# Altium PCB max.PcbDoc
Units mm, origin at the board's own origin, x right, y up, seen from the top; angles counter-clockwise.
Board outline 61 x 42 mm, 2 copper layers (Top Layer, Bottom Layer); 14 components, 20 nets, 110 pads, 35 vias.
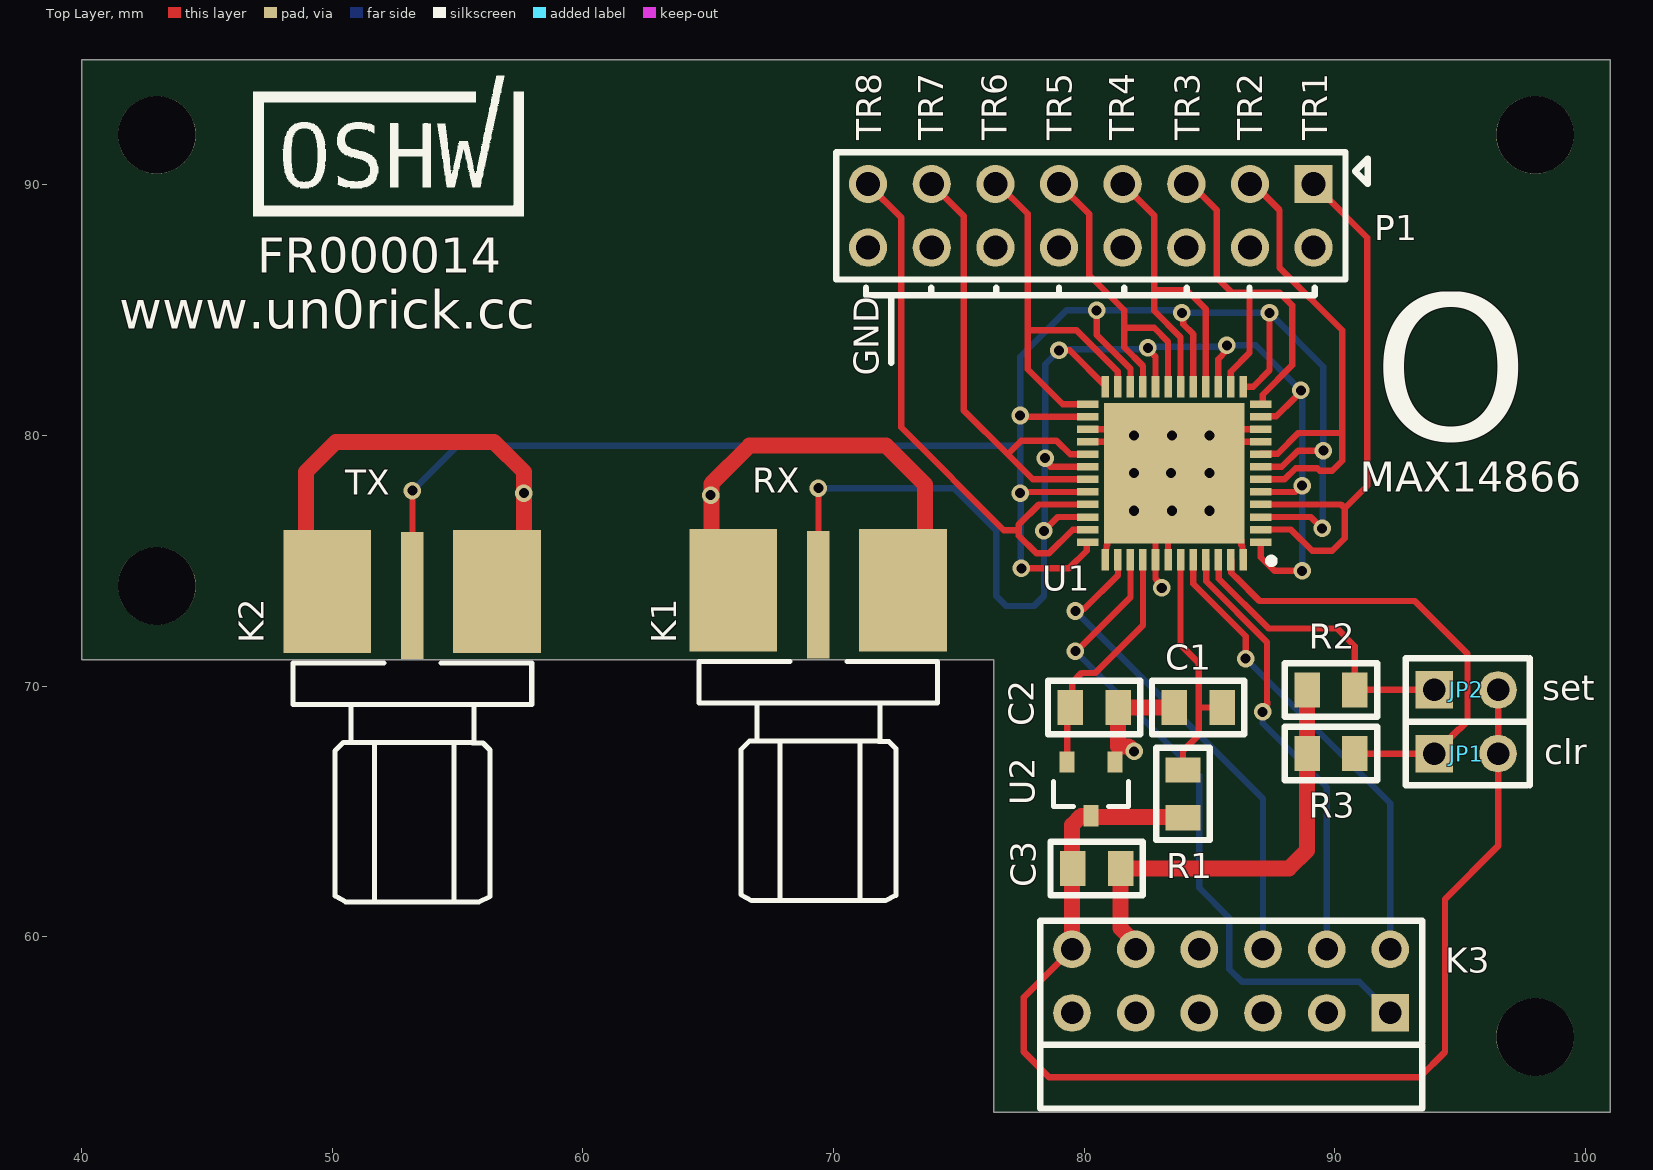
[diagram p0: Top Layer view]
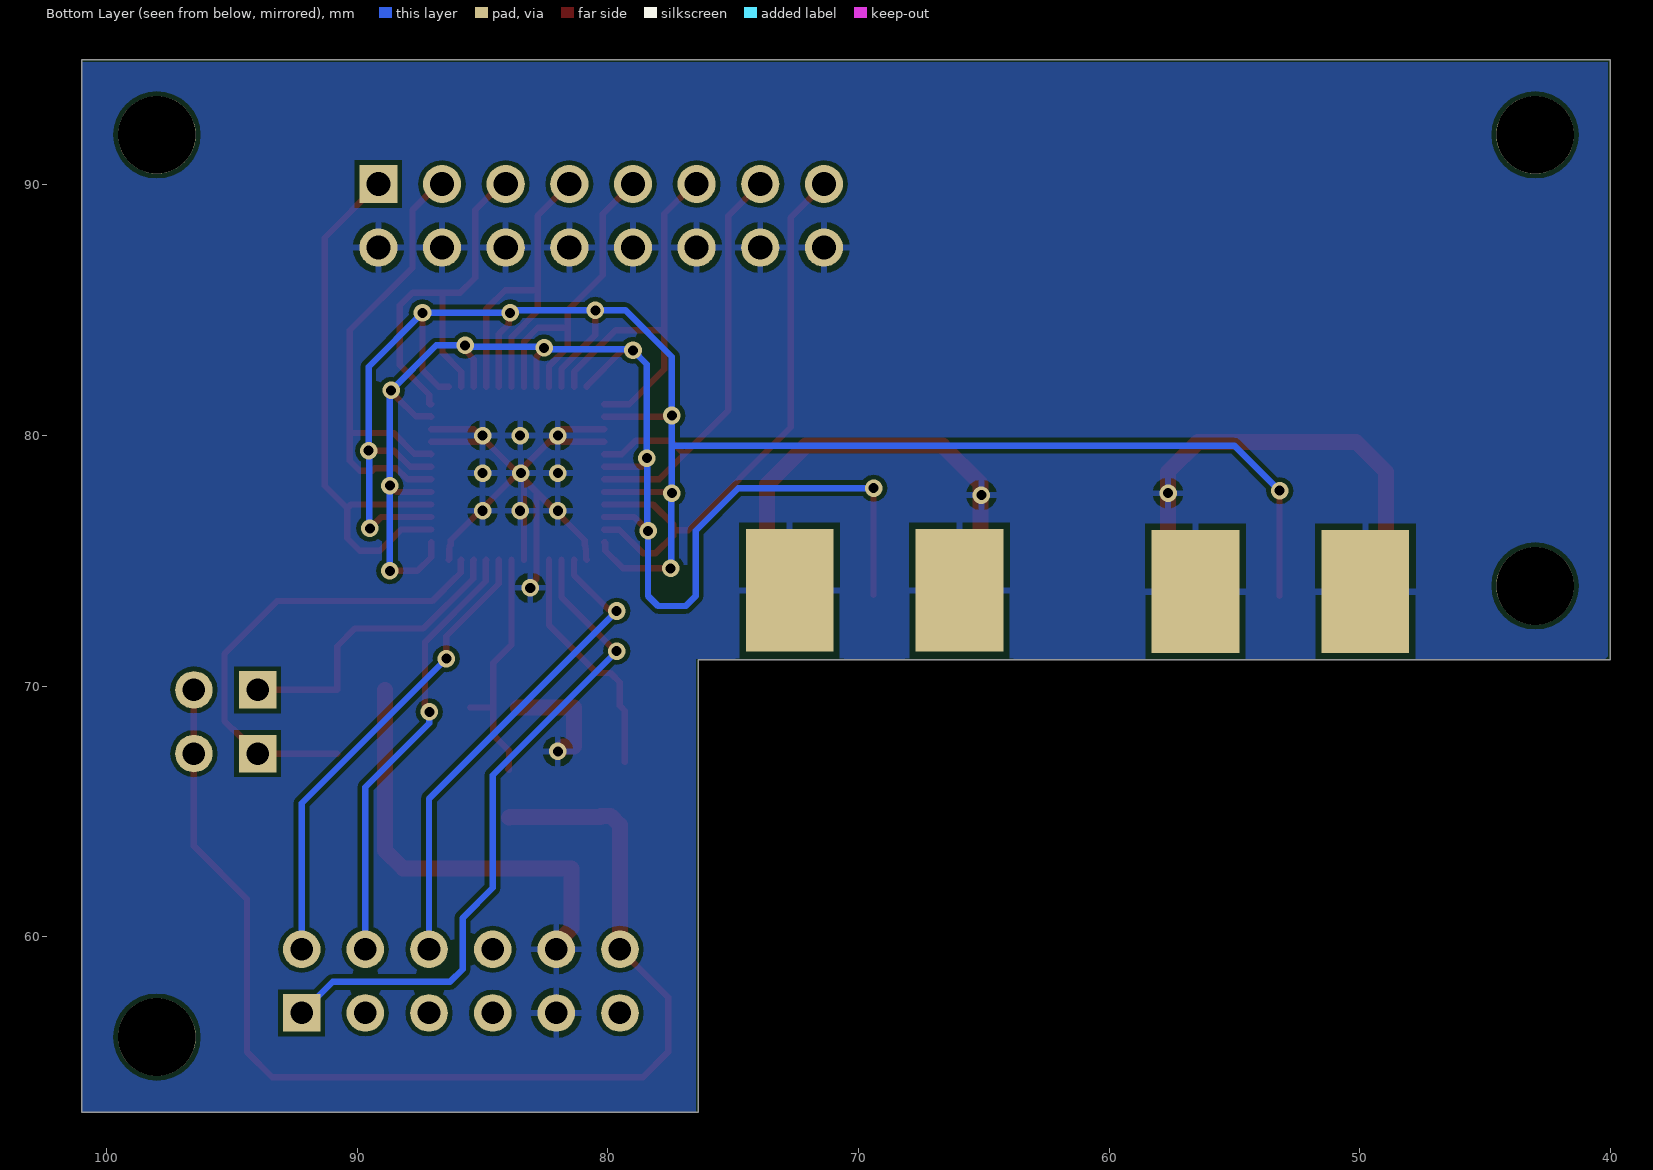
[diagram p1: Bottom Layer view, seen from below]

## Layer stack, top to bottom
Top Solder: solder mask 0.0102, Solder Resist, Dk 3.5
Top Layer: signal copper 0.0356
Dielectric 1: dielectric 0.32, FR-4, Dk 4.8
Bottom Layer: signal copper 0.0356
Bottom Solder: solder mask 0.0102, Solder Resist, Dk 3.5

## Board outline
76.404,71.054 76.404,53 101,53 101,95 40,95 40,71.054

## Design rules (kind name [scope] priority, off if disabled: settings)
Clearance [All] p1: gap=0.178 ignorepadtopadclearanceinfootprint=TRUE
ComponentClearance [All] p1: gap=0 collisioncheckmode=3 verticalgap=0 showdistances=FALSE
HoleSize [All] p1: absolutevalues=TRUE maxlimit=3.81 minlimit=0.025 maxpercent=80.000 minpercent=20.000
MinimumSolderMaskSliver [All] p1: minsoldermaskwidth=0
PolygonConnect [All] p1: connectstyle=Relief reliefconductorwidth=0.254 reliefentries=4 polygonreliefangle="90 Angle" airgapwidth=0.254
RoutingVias [All] p1: holewidth=0.3 width=0.7 viastyle="Through Hole" minholewidth=0.3 minwidth=0.7 maxholewidth=0.3 maxwidth=0.7
SilkToSilkClearance [All] p1: silktosilkclearance=0.152
SilkToSolderMaskClearance [IsPad] p1: minsilkscreentomaskgap=0.102 clearancetoexposedcopper=TRUE
SolderMaskExpansion [All] p1: expansion=0.102 istentingtop=FALSE
Width [All] p1: maxlimit=2.54 minlimit=0.254 preferedwidth=0.254
25 further rules are at their usual default settings.

## Components (designator, comment, footprint, x,y, rotation, side; value= is the part's Value field where it differs from the comment)
C1 "cap0805" SM0805 85.505,69.15 r180 top value=0.1
C2 "cap0805" SM0805 79.45,69.15 r0 top value=1u
C3 "cap0805" SM0805 81.455,62.725 r180 top value=1u
JP1 "JUMPER2" JUMPER2 93.98,67.31 r90 top
JP2 "JUMPER2" JUMPER2 93.98,69.85 r90 top
K1 "SMA_MALE_FEMALE" "AMPHENOL_MALE _FEMALE" 69.4,72.25 r90 top
K2 "SMA_MALE_FEMALE" "AMPHENOL_MALE _FEMALE" 53.2,72.2 r90 top
K3 "PMOD_6x2_ra_male_mirrored" PMOD_6x2_RA_MALE_MIRRORED 79.52,59.5 r0 top
P1 "2x8, 2.54mm vertical" "2x8 pin 2.54mm" 89.16,90.04 r270 top
R1 "res0805_EU" SM0805 83.95,66.655 r270 top value=10
R2 "res0805_EU" SM0805 90.805,69.85 r180 top value=10k
R3 "res0805_EU" SM0805 90.805,67.31 r180 top value=10k
U1 "MAX14866UTM+" QFN50P700X700X80-49N 83.6,78.5 r180 top
U2 "XC6206" SOT-23 80.275,65.9 r270 top

## Footprints (in the part's own frame and the unit in brackets; to place one, negate y for a bottom-side part, rotate by r counter-clockwise, add the part's x,y. Pads: shape width x height; smd on the part's side, far side on the other; paste and mask are expansions set on the pad)
"2x8 pin 2.54mm" [mil] "2x8 pin 2.54mm"
  rect 60x60 hole 38: 1(0,0)
  round 60 hole 38: 2(100,0) 3(0,-100) 4(100,-100) 5(0,-200) 6(100,-200) 7(0,-300) 8(100,-300) 9(0,-400) 10(100,-400) 11(0,-500) 12(100,-500) 13(0,-600) 14(100,-600) 15(0,-700) 16(100,-700)
  silkscreen extent -50,-750 150,85
"AMPHENOL_MALE _FEMALE" [mm]
  rect 5.1x0.9 smd: 1(1.397,0)
  rect 4.9x3.5 smd: 2(1.575,3.4) 2(1.575,-3.375)
  rect 4.9x3.5 smd far side: 2(1.575,3.425) 2(1.575,-3.35)
  silkscreen extent -10.81,-4.76 -1.28,4.76, body extent -10.8,-4.76 3.48,4.76, height 4.08
JUMPER2 [mm]
  rect 1.5x1.5 hole 0.9: 1(0,0)
  round 1.5 hole 0.9: 2(0,-2.54)
  silkscreen extent -1.27,-3.81 1.27,1.14
PMOD_6x2_RA_MALE_MIRRORED [mm] "2.54 mm right angle 6x2 pins"
  rect 1.5x1.5 hole 0.9: 1(12.7,-2.54)
  round 1.5 hole 0.9: 2(10.16,-2.54) 3(7.62,-2.54) 4(5.08,-2.54) 5(2.54,-2.54) 6(0,-2.54) 7(12.7,0) 8(10.16,0) 9(7.62,0) 10(5.08,0) 11(2.54,0) 12(0,0)
  silkscreen extent -1.27,-6.35 13.97,1.14
QFN50P700X700X80-49N [mm]
  rect 0.85x0.3 smd: 1(-3.45,2.75) 2(-3.45,2.25) 3(-3.45,1.75) 4(-3.45,1.25) 5(-3.45,0.75) 6(-3.45,0.25) 7(-3.45,-0.25) 8(-3.45,-0.75) 9(-3.45,-1.25) 10(-3.45,-1.75) 11(-3.45,-2.25) 12(-3.45,-2.75) 25(3.45,-2.75) 26(3.45,-2.25) 27(3.45,-1.75) 28(3.45,-1.25) 29(3.45,-0.75) 30(3.45,-0.25) 31(3.45,0.25) 32(3.45,0.75) 33(3.45,1.25) 34(3.45,1.75) 35(3.45,2.25) 36(3.45,2.75)
  rect 0.3x0.85 smd: 13(-2.75,-3.45) 14(-2.25,-3.45) 15(-1.75,-3.45) 16(-1.25,-3.45) 17(-0.75,-3.45) 18(-0.25,-3.45) 19(0.25,-3.45) 20(0.75,-3.45) 21(1.25,-3.45) 22(1.75,-3.45) 23(2.25,-3.45) 24(2.75,-3.45) 37(2.75,3.45) 38(2.25,3.45) 39(1.75,3.45) 40(1.25,3.45) 41(0.75,3.45) 42(0.25,3.45) 43(-0.25,3.45) 44(-0.75,3.45) 45(-1.25,3.45) 46(-1.75,3.45) 47(-2.25,3.45) 48(-2.75,3.45)
  rect 5.6x5.6 smd: 49(0,0)
  silkscreen extent -4,3.38 -3.75,3.62, body extent -3.55,-3.55 3.55,3.55, height 0.8
SM0805 [mil]
  rect 40x55 smd: 1(0,0) 2(75,0)
  silkscreen extent -35,-42 110,42
SOT-23 [mm] "SOT23_L from misc devices"
  rect 0.85x0.6 smd: 1(-1.075,0.95) 2(-1.075,-0.95) 3(1.075,0)
  silkscreen extent -0.3,-1.5 0.7,1.5, body extent -0.7,-1.5 0.7,1.5, height 1.1

## Part data
C1 C2 C3: "Capacitor", LatestRevisionDate=17-Jul-2002, LatestRevisionNote="Re-released for DXP Platform.", PackageDescription="Radial Cap, Thru-Hole; 2 Leads; 0.3 in Pin Spacing", PackageReference=RAD-0.3, Published=8-Jun-2000, Publisher="Altium Limited"
K3: "PMOD_6x2_right_angle"
P1: library part "2x8, 2.54mm, vertical", "Header, 16-Pin", LatestRevisionDate=17-Jul-2002, LatestRevisionNote="Re-released for DXP Platform.", Publisher="Altium Limited"
R1 R2 R3: "Resistor", LatestRevisionDate=29-May-2009, LatestRevisionNote="IPC-7351 Footprint Added.", PackageDescription="Chip Resistor", PackageReference=J1-0603, Published=8-Jun-2000, Publisher="Altium Limited"
U1: "Integrated Circuit", Manufacturer_Name="Maxim Integrated", Mouser Part Number=700-MAX14866UTM+, Datasheet Link=https://www.mouser.com/datasheet/2/256/MAX14866-1154497.pdf, Height=0.8mm, Manufacturer_Part_Number=MAX14866UTM+, Mouser Price/Stock=https://www.mouser.co.uk/ProductDetail/Maxim-Integrated/MAX14866UTM%2b?qs=1mbolxNpo8f6nC88ZZmOdg%3D%3D
U2: "SOT-23-3 ldo"

## Free pads (board coordinates)
  round 3.1 hole 3.1 unplated: 0(43,74) 0(43,92) 0(98,56) 0(98,92)

## Via types
v1: diameter 0.7, hole 0.4, Top Layer to Bottom Layer, 35 vias

## Nets (pads, with @x,y where several pads share a name; then routed paths per layer and width w, separated by ;. In a path a pad name is that pad's centre, name@x,y a point inside that pad or via, vN(x,y) a via of type N, cw(c..) or ccw(c..) an arc to the next point about the centre after c; other vN are vias at no path point)
+5V: C3.2 JP1.2 JP2.2 K3.12 R1.2 U2.3 | length 47.4
  Top Layer w0.254: K3.12 77.6,57.58 77.6,55.4 78.6,54.4 93.4,54.4 94.4,55.4 94.4,61.5 96.52,63.62 JP1.2 JP2.2
  Top Layer w0.635: K3.12 79.52,64.453 79.892,64.825 U2.3 80.275,64.805 80.293,64.788 83.912,64.788 R1.2
clk: K3.8 U1.45 | length 17.7
  Top Layer w0.254: U1.45 84.873,75.027 84.873,74.18 87.3,71.753 87.3,69.375 87.307,69.368 87.307,69.278 87.125,69.096 v1(87.125,68.975)
  Bottom Layer w0.254: v1(87.125,68.975) 87.125,68.525 89.68,65.97 K3.8
clr: JP1.1 R3.1 U1.47 | length 19
  Top Layer w0.254: U1.47 85.873,75.027 85.873,74.521 86.074,74.32 86.08,74.32 87,73.4 93.2,73.4 95.3,71.3 95.3,68.6 94.992,68.292 94.962,68.292 JP1.1 90.905,67.31 R3.1
din: K3.7 U1.44 | length 18.7
  Top Layer w0.254: U1.44 84.35,74.093 86.45,71.993 86.45,71.306 86.444,71.3 v1@86.4,71.3
  Bottom Layer w0.254: v1(86.45,71.1) 92.22,65.33 K3.7
dout: K3.1 U1.39 | length 26.9
  Top Layer w0.254: v1@79.7,71.4 80.4,72.1 81.85,73.55 U1.39
  Bottom Layer w0.254: v1(79.65,71.4) 84.6,66.45 84.6,61.95 85.8,60.75 85.8,58.7 86.3,58.2 90.98,58.2 K3.1
GND: C1.2 C2.2 C3.1 K1.2 K2.2 K3.5 K3.11 P1.2 P1.4 P1.6 P1.8 P1.10 P1.12 P1.14 P1.16 R2.2 R3.2 U1.9 U1.10 U1.27 U1.28 U1.37 U1.41 U1.42 U1.48 U1.49 U2.1 | length 89.1
  Top Layer w0.254: U1.28 U1.49@82.35,79.75 ; U1.27 81.85,80.25 U1.49@82.35,79.75 ; U1.37 80.873,75.073 80.873,75.467 80.895,75.489 80.895,75.601 80.927,75.633 80.927,75.827 U1.49@82.85,77.75 ; C2.2@81.16,68.959 C2.2@81.16,69.15 ; v1(83.1,73.925) 83.1,74.03 82.85,74.28 U1.41 U1.49@82.85,77.75 ; U1.42 U1.49@83.35,78.25 ; U1.48 86.327,75.073 86.327,75.467 86.32,75.474 86.32,75.586 86.273,75.633 86.273,75.827 U1.49 ; U1.9 U1.49@84.85,79.75 ; U1.10 85.35,80.25 U1.49@84.85,79.75 ; U1.49@82.35,79.75 83.475,78.625 v1(83.475,78.5) ; U1.49@82.85,77.75 U1.49@83.35,78.25 ; U1.49@83.35,78.25 83.475,78.375 v1(83.475,78.5) ; v1(83.475,78.5) U1.49 ; v1(83.475,78.5) U1.49 ; U1.49 U1.49@84.85,79.75
  Top Layer w0.635: K2.2@48.95,73.775 48.95,78.55 50.15,79.75 56.45,79.75 57.65,78.55 57.65,73.975 K2.2@57.45,73.775 ; K1.2@65.15,73.825 65.125,73.85 65.125,78.075 66.65,79.6 72.1,79.6 73.65,78.05 K1.2@73.65,73.825 ; v1@81.95,67.425 81.775,67.6 81.355,67.6 C2.2 C1.2 ; K3.11 82.06,59.734 81.455,60.339 C3.1 88.175,62.725 88.9,63.45 R3.2 R2.2
  other v1: 82,67.4 82,77 83.5,77 85,77 65.1,77.625 57.65,77.7 82,78.5 85,78.5 82,80 83.5,80 85,80
le: K3.9 U1.38 | length 19.5
  Top Layer w0.254: v1(79.65,73) 79.735,73.085 80.01,73.085 81.352,74.427 81.352,75.048 U1.38
  Bottom Layer w0.254: v1(79.65,73) 87.14,65.51 K3.9
NetC1_1: C1.1 R1.1 U1.43 | length 9.9
  Top Layer w0.254: U1.43 83.85,71.65 84.575,70.925 84.575,69.125 ; R1.1@83.975,66.68 R1.1 83.95,67.425 84.575,68.05 84.575,69.125 ; C1.1 84.6,69.15 84.575,69.125
NetC2_1: C2.1 U1.40 U2.2 | length 9.7
  Top Layer w0.254: U2.2 79.325,69.025 C2.1 79.525,69.225 79.525,70.15 79.9,70.525 80.45,70.525 82.35,72.425 U1.40
NetK1_1: K1.1 U1.1 U1.5 U1.11 U1.15 U1.20 U1.24 U1.30 U1.34 | length 60.2
  Top Layer w0.254: K1.1 v1(69.4,77.9) ; v1(78.4,76.2) 78.95,76.75 U1.34 ; v1@78.4,79 78.65,78.75 U1.30 ; v1(79,83.4) 79.427,83.4 80.85,81.977 U1.24 ; v1@82.6,83.4 82.85,83.15 U1.20 ; U1.15 85.35,83.05 85.7,83.4 v1(85.7,83.6) ; U1.1 87.05,75.15 87.6,74.6 v1(88.7,74.6) ; U1.5 88.429,77.75 88.679,78 v1(88.7,78) ; U1.11 87.073,80.773 87.673,80.773 88.4,81.5
  Bottom Layer w0.254: v1(69.4,77.9) 74.8,77.9 76.5,76.2 76.5,73.6 76.9,73.2 78,73.2 78.4,73.6 v1(78.4,76.2) 78.425,76.225 78.425,79.075 v1(78.45,79.1) 78.45,82.85 v1(79,83.4) 79.05,83.45 82.5,83.45 v1(82.55,83.5) 82.6,83.55 85.65,83.55 v1(85.7,83.6) 86.85,83.6 v1(88.65,81.8) 88.7,81.75 v1(88.7,78) 88.7,75.735 v1(88.7,74.6)
NetK2_1: K2.1 U1.3 U1.7 U1.13 U1.17 U1.22 U1.26 U1.32 U1.36 | length 82.4
  Top Layer w0.254: K2.1 v1(53.2,77.8) ; v1@77.4,77.7 77.45,77.75 U1.32 ; v1(77.5,74.7) 79.4,74.7 80.1,75.4 80.1,75.727 80.123,75.75 U1.36 ; v1@77.5,80.8 77.55,80.75 U1.26 ; v1(80.5,85) 80.5,84.013 81.85,82.663 U1.22 ; v1@83.8,84.8 83.857,84.8 83.963,84.694 83.963,84.437 84.35,84.05 U1.17 ; U1.13 86.75,81.95 87.4,82.6 v1(87.4,84.9) ; U1.3 89.05,76.75 v1(89.5,76.3) ; U1.7 87.053,78.753 87.892,78.753 88.539,79.4 v1@89.5,79.4
  Bottom Layer w0.254: v1(53.2,77.8) 55,79.6 77.45,79.6 ; v1(77.5,74.7) 77.475,74.725 77.475,77.675 v1(77.45,77.7) 77.45,79.6 ; v1(89.5,76.3) 89.525,76.325 89.525,79.375 v1(89.55,79.4) 89.55,82.75 v1(87.4,84.9) v1(83.9,84.9) 83.779,84.9 83.679,85 v1(80.5,85) 79.3,85 77.45,83.15 v1(77.45,80.8) 77.45,79.6
set: JP2.1 R2.1 U1.46 | length 12.2
  Top Layer w0.254: U1.46 85.373,75.027 85.373,74.291 87.364,72.3 90.1,72.3 90.805,71.595 R2.1 JP2.1
tr1: P1.1 U1.2 U1.4 | length 22.7
  Top Layer w0.254: U1.2 88.25,76.25 89.1,75.4 89.9,75.4 90.4,75.9 90.4,77.1 ; U1.4 90.25,77.25 90.4,77.1 ; P1.1 91.3,87.9 91.3,78 90.4,77.1
tr2: P1.3 U1.6 U1.8 | length 19.9
  Top Layer w0.254: P1.3 86.76,90.04 87.8,89 87.8,86.7 90.3,84.2 90.3,80.1 ; U1.6 88,78.25 88.45,78.7 89.3,78.7 89.4,78.6 89.9,78.6 90.3,79 90.3,80.1 ; U1.8 87.073,79.273 87.723,79.273 88.55,80.1 90.3,80.1
tr3: P1.5 U1.12 U1.14 | length 16.4
  Top Layer w0.254: P1.5 84.26,90.04 85.3,89 85.3,86.3 85.9,85.7 86.6,85.7 ; U1.14 85.853,81.953 85.853,82.553 86.6,83.3 86.6,85.7 ; U1.12 87.109,81.25 87.132,81.273 87.132,81.632 88.3,82.8 88.3,85.2 87.8,85.7 86.6,85.7
tr4: P1.7 U1.16 U1.18 | length 14.5
  Top Layer w0.254: P1.7 82.8,88.78 82.8,85.9 ; U1.18 83.85,83.925 82.8,84.975 82.8,85.8 82.8,85.9 ; U1.16 84.85,85.05 84.1,85.8 82.9,85.8 82.8,85.9
tr5: P1.9 U1.19 U1.21 | length 13.3
  Top Layer w0.254: P1.9 80.2,88.84 80.2,86.4 81.6,85 81.6,84.3 ; U1.21 82.35,82.774 81.6,83.524 81.6,84.3 ; U1.19 83.35,83.75 82.8,84.3 81.6,84.3
tr6: P1.11 U1.23 U1.25 | length 15.8
  Top Layer w0.254: P1.11 76.56,90.04 77.75,88.85 77.75,84.2 ; U1.25 79.15,81.25 77.75,82.65 77.75,84.2 ; U1.23 81.342,81.958 81.342,82.558 79.7,84.2 77.75,84.2
tr7: P1.13 U1.29 U1.31 | length 19.3
  Top Layer w0.254: P1.13 75.2,88.76 75.2,81 76.95,79.25 ; U1.31 77.95,78.25 76.95,79.25 ; U1.29 79.45,79.25 78.9,79.8 77.5,79.8 76.95,79.25
tr8: P1.15 U1.33 U1.35 | length 23.6
  Top Layer w0.254: P1.15 71.38,90.02 72.7,88.7 72.7,80.325 76.8,76.225 77.4,76.225 ; U1.35 80.147,76.247 79.547,76.247 78.6,75.3 78.1,75.3 77.4,76 77.4,76.225 ; U1.33 78.2,77.25 77.4,76.45 77.4,76.225
pads on no net: K3.2 K3.3 K3.4 K3.6 K3.10

## Polygon pours and split planes (outlines as drawn)
GND on Bottom Layer "GND_L02_P000" (solid, pour order 0): 40.1,94.9 40.1,71.2 40.2,71.1 76.5,71.1 76.5,53 101,53 101,94.9

## Silkscreen, mask and mechanical layers (free items; w line width, h text height)
Top Overlay:
  drawing of 16 lines, arcs and shapes, not listed
  text "TR8" at 71.91,91.79 h1 r90
  text "TR6" at 76.91,91.79 h1 r90
  text "TR5" at 79.51,91.79 h1 r90
  text "TR4" at 82.01,91.79 h1 r90
  text "TR3" at 84.61,91.79 h1 r90
  text "TR2" at 87.11,91.79 h1 r90
  text "TR1" at 89.71,91.79 h1 r90
  text "TR7" at 74.383,91.779 h1 r90
  text "FR000014" at 47.004,86.504 h1.4
  text "www.un0rick.cc" at 41.504,84.254 h1.52
  text "GND" at 71.81,82.39 h1 r90
  text "MAX14866" at 91,77.75 h1.2
  text "RX" at 66.765,77.715 h1
  text "TX" at 50.515,77.64 h1
  text "O" at 91.5,77 h15
  text "set" at 98.29,69.44 h1
  text "clr" at 98.365,66.89 h1
Mechanical 1:
  lines w0.254: 40,71 76.4,71 76.4,53 101,53 101,95 40,95 40,71